# Altium PCB PCB.PcbDoc
Units mm, origin at the board's own origin, x right, y up, seen from the top; angles counter-clockwise.
Board outline 60 x 125.5 mm, 2 copper layers (Top Layer, Bottom Layer); 26 components, 15 nets, 73 pads, 131 vias.
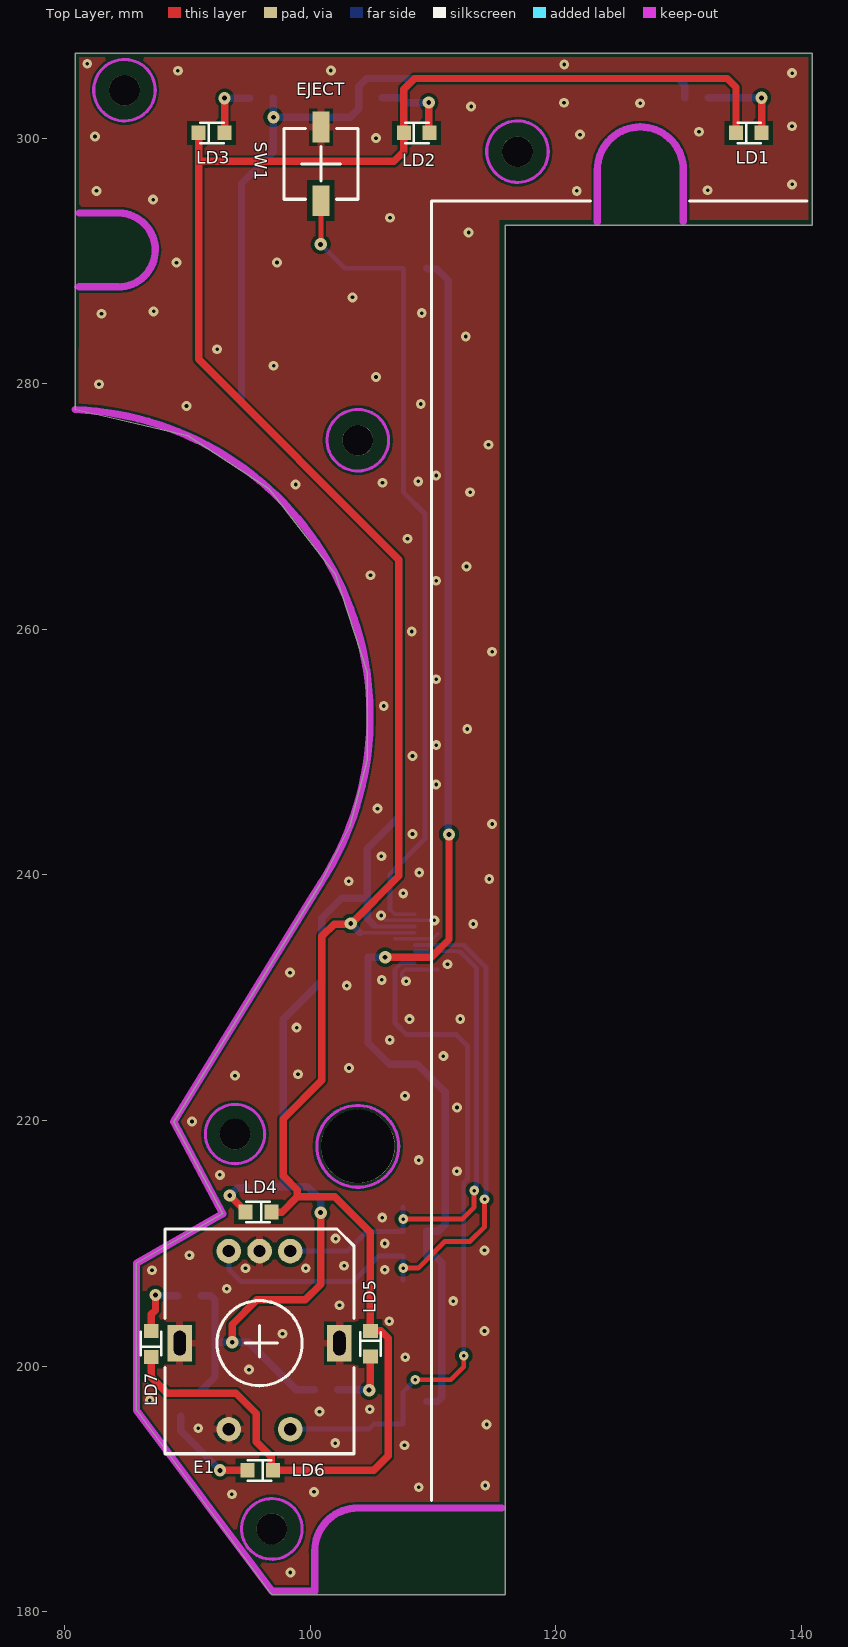
[diagram p0: Top Layer view]
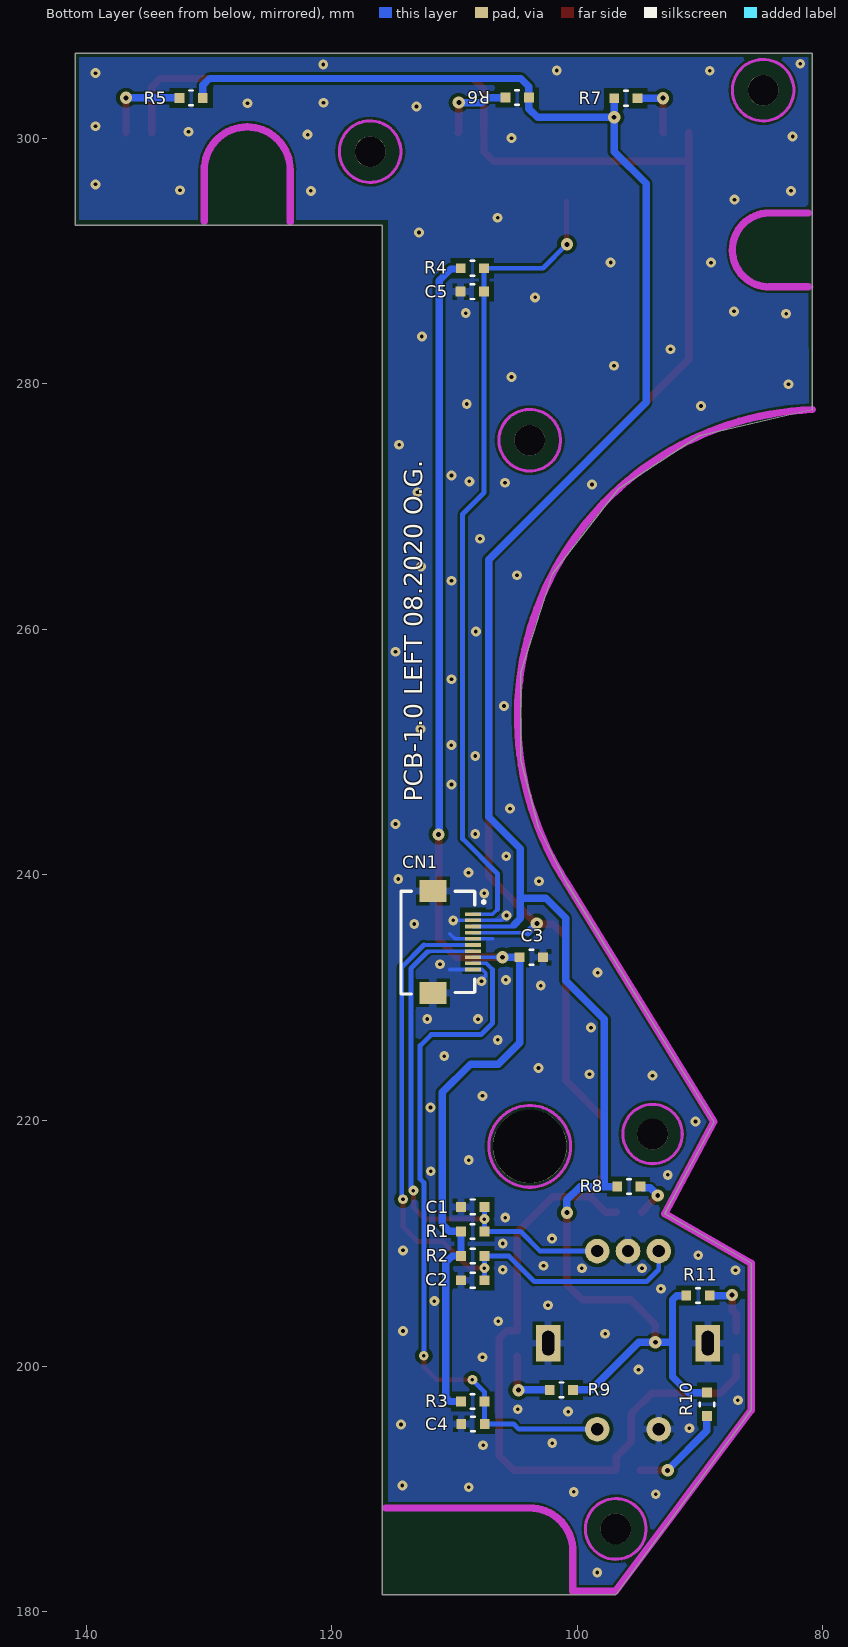
[diagram p1: Bottom Layer view, seen from below]
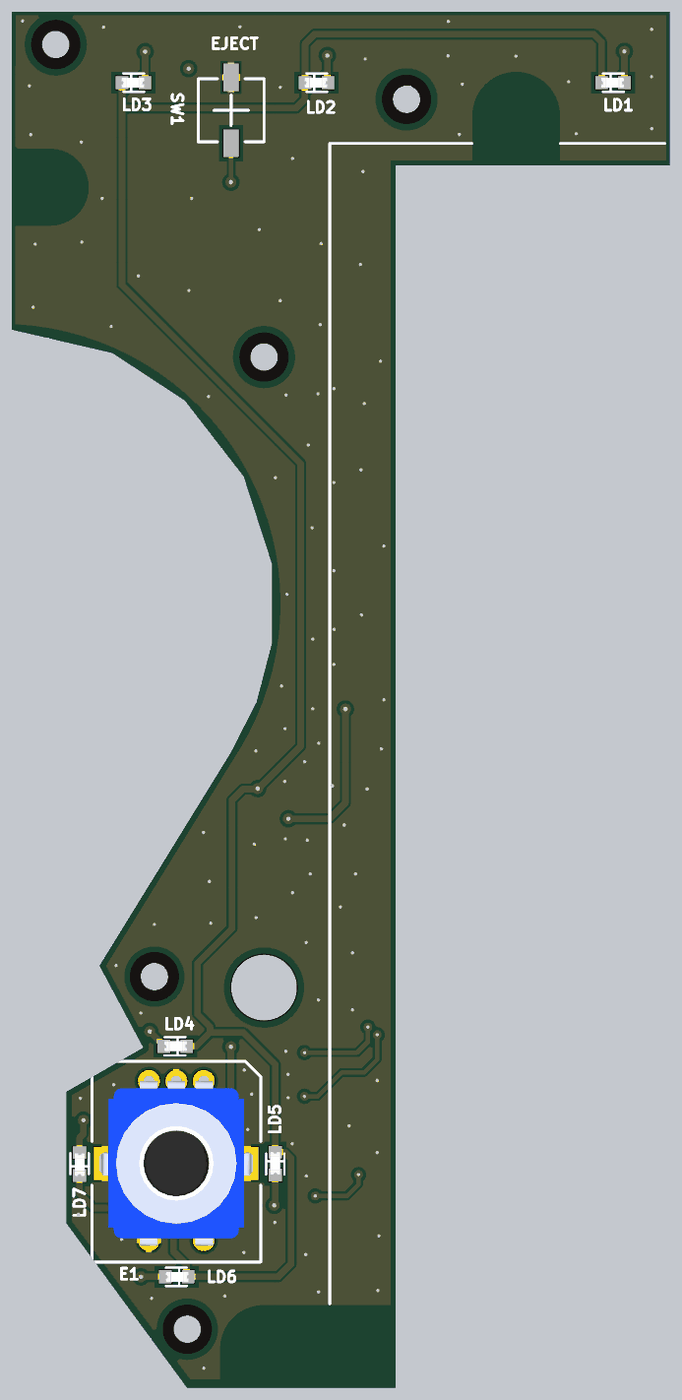
[diagram p2: 3D render of the assembled board from above, using the file's embedded part models]
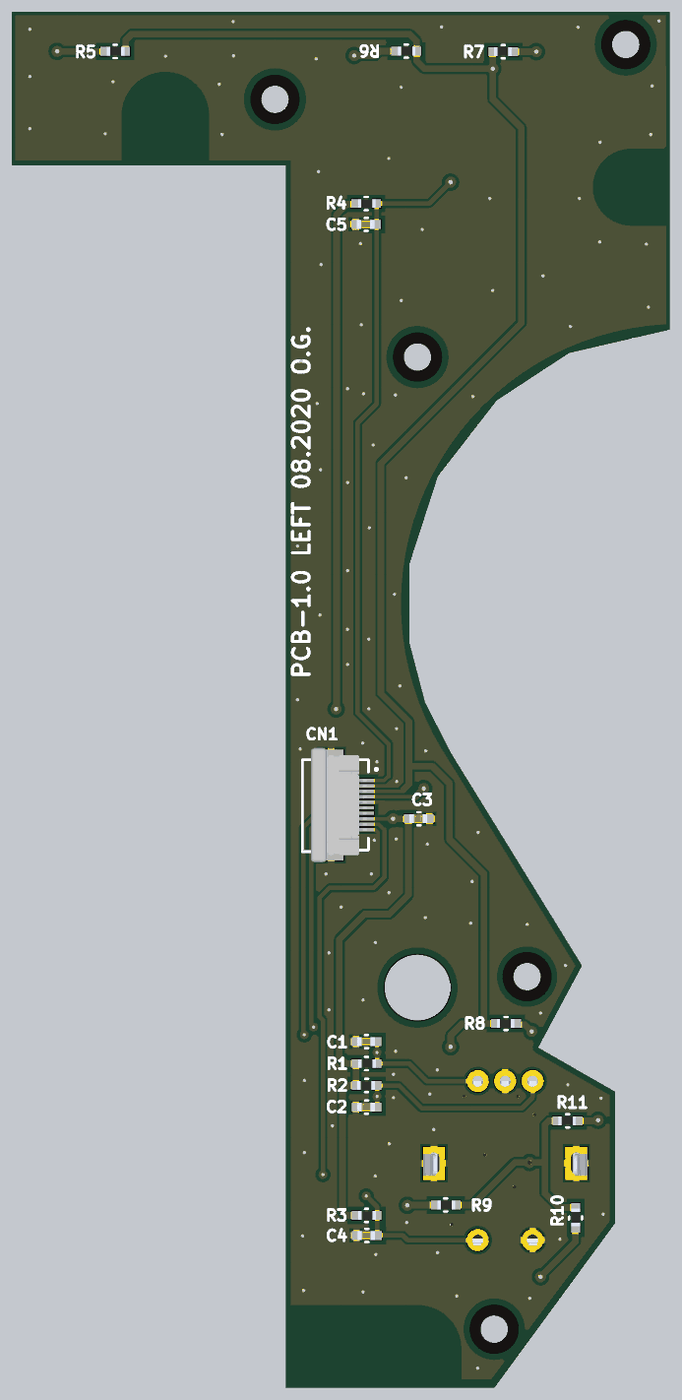
[diagram p3: 3D render of the assembled board from below, using the file's embedded part models]

## Layer stack, top to bottom
Top Solder: solder mask 0.0102, Solder Resist, Dk 3.5
Top Layer: signal copper 0.0356
Dielectric 1: dielectric 0.32, FR-4, Dk 4.8
Bottom Layer: signal copper 0.0356
Bottom Solder: solder mask 0.0102, Solder Resist, Dk 3.5

## Board outline
80.875,306.9 80.875,277.9 90.05,275.775 96.65,271.45 102.025,264.525 104.625,256.5 104.625,249.375 103.2,243.925 100.85,239.325 88.875,219.9 92.875,212.425 85.85,208.4 85.85,196.425 96.85,181.425 96.875,181.4 115.875,181.4 115.875,292.9 140.875,292.9 140.875,306.9

## Design rules (kind name [scope] priority, off if disabled: settings)
Clearance [All] p1: gap=0.2 ignorepadtopadclearanceinfootprint=FALSE except(0.3: THPad-Fill THPad-Poly THPad-Region Via-Fill Via-Poly Via-Region; 0.4: SMDPad-Fill SMDPad-Poly SMDPad-Region Fill-Fill Fill-Poly Fill-Region Poly-Poly Poly-Region Region-Region)
DiffPairsRouting [All] p1: maxlimit=0.254 minlimit=0.2 mostfreqgap=0.2 toplayer_minwidth=0.2 toplayer_maxwidth=0.381 toplayer_prefwidth=0.2 bottomlayer_minwidth=0.2 bottomlayer_maxwidth=0.381 bottomlayer_prefwidth=0.2 maxuncoupledlength=12.7
PolygonConnect [All] p1: thpad.connectstyle=Relief thpad.reliefconductorwidth=0.6 thpad.reliefentries=4 thpad.polygonreliefangle="90 Angle" thpad.airgapwidth=0.254 smdpad.connectstyle=Relief smdpad.reliefconductorwidth=0.6 smdpad.reliefentries=4 smdpad.polygonreliefangle="90 Angle" smdpad.airgapwidth=0.254 via.connectstyle=Direct via.reliefconductorwidth=0.6 via.reliefentries=4 via.polygonreliefangle="90 Angle" via.airgapwidth=0.254
RoomDefinition left_panel [InComponentClass('left_panel')] p1 off: confinementstyle=ConfineIn formatcopy=TRUE lockcomponents=FALSE outline 167.94,228.669 195.84,228.669 195.84,250.07 167.94,250.07
RoutingVias [All] p1: holewidth=0.4 width=1 viastyle="Through Hole" minholewidth=0.4 minwidth=1 maxholewidth=0.4 maxwidth=1
SolderMaskExpansion [All] p1: expansion=0.102
Width [All] p1: maxlimit=2 minlimit=0.3 preferedwidth=0.3 minimp=50.000000 maximp=50.000000 favimp=50.000000
29 further rules are at their usual default settings.

## Components (designator, comment, footprint, x,y, rotation, side; value= is the part's Value field where it differs from the comment)
C1 "CL10B103KB8NNNC" C0603 107.57,212.975 r0 bottom value=0.01uF
C2 "CL10B103KB8NNNC" C0603 107.57,207 r0 bottom value=0.01uF
C3 "CC0603KRX7R9BB104" C0603 102.795,233.3 r0 bottom value=0.1uF
C4 "CL10B103KB8NNNC" C0603 107.545,195.3 r0 bottom value=0.01uF
C5 "CL10B103KB8NNNC" C0603 107.6,287.5 r0 bottom value=0.01uF
CN1 "HDR10" 10S-0.5SH 111.5,234.45 r270 bottom locked
E1 "VOLUME/POWER" "Rotary Encoder" 95.875,201.875 r180 top locked
LD1 "LED_R" LED0805 134.793,300.425 r0 top locked
LD2 "LED_R" LED0805 107.743,300.425 r0 top locked
LD3 "LED_R" LED0805 91.043,300.425 r0 top locked
LD4 "LED_R" LED0805 96.7,212.55 r180 top
LD5 "LED_R" LED0805 104.9,202.757 r270 top locked
LD6 "LED_R" LED0805 96.832,191.525 r180 top locked
LD7 "LED_R" LED0805 87.05,200.893 r90 top locked
R1 "10k" R0603 109.475,210.975 r180 bottom
R2 "10k" R0603 107.57,208.975 r0 bottom
R3 "10k" R0603 109.475,197.125 r180 bottom
R4 "10k" R0603 109.5,289.4 r180 bottom
R5 "620" R0603 132.4,303.275 r180 bottom
R6 "620" R0603 105.855,303.3 r180 bottom
R7 "620" R0603 95.095,303.25 r0 bottom
R8 "620" R0603 94.845,214.625 r0 bottom
R9 "620" R0603 102.25,198.075 r180 bottom
R10 "620" R0603 89.45,195.945 r90 bottom
R11 "620" R0603 89.225,205.75 r0 bottom
SW1 "EJECT" 6X6-SMT-2PIN 100.875,297.9 r270 top value="SW tact 2-pin"

## Footprints (in the part's own frame and the unit in brackets; to place one, negate y for a bottom-side part, rotate by r counter-clockwise, add the part's x,y. Pads: shape width x height; smd on the part's side, far side on the other; paste and mask are expansions set on the pad)
6X6-SMT-2PIN [mm]
  rect 2.5x1.4 smd: 1(-3,0) 2(3,0)
  silkscreen extent -2.88,-3 2.88,3, body extent -2.88,-3 2.88,2.98, height 5
10S-0.5SH [mm]
  rect 0.3x1.3 smd: 1(-2.35,3) 2(-1.85,3) 3(-1.35,3) 4(-0.85,3) 5(-0.35,3) 6(0.15,3) 7(0.65,3) 8(1.15,3) 9(1.65,3) 10(2.15,3)
  rect 1.8x2.2 smd: ""(-4.25,-0.25) ""(4.05,-0.25)
  silkscreen extent -4.23,-2.88 4.15,3.98, body extent -5.31,-2.11 5.12,3, height 2.1
C0603 [mm]
  rect 0.8x0.8 smd: 1(1.905,0) 2(0,0)
  silkscreen extent 0.8,-0.6 1.1,0.6, body extent 0.2,-0.4 1.8,0.4, height 0.9
LED0805 [mm]
  rect 1.14x1.2 smd: 1(-0.127,0) 2(1.957,0)
  silkscreen extent 0,-0.83 1.91,0.84, body extent -0.16,-0.46 1.9,0.45, height 0.85
R0603 [mm]
  rect 0.8x0.8 smd: 1(1.905,0) 2(0,0)
  silkscreen extent 0.8,-0.6 1.1,0.6, body extent 0.2,-0.4 1.8,0.4, height 0.5
"Rotary Encoder" [mm] "Rotary Encoder - SW"
  round 2 hole 1: 1(-2.5,-7.5) 2(0,-7.5) 3(2.5,-7.5) 4(2.5,7) 5(-2.5,7)
  rect 2x3 hole 1 slot 2 at 90 deg: MP1(-6.5,0) MP2(6.5,0)
  silkscreen extent -7.7,-9.3 7.7,9, body extent -7.5,-7.5 7.5,7.5, height 16.2

## Part data
C1 C2 C3 C4 C5: library part CAP_NPOL, "CAP_NPOL"
CN1: library part "HDR 10", "Header, 10-Pin", LatestRevisionDate=17-Jul-2002, LatestRevisionNote="Re-released for DXP Platform.", Publisher="Altium Limited"
E1: library part ENC_SW, "ENC_SW"
LD1 LD2 LD3 LD4 LD5 LD6 LD7: library part LED_RED, "LED Red"
R1 R2 R3 R4 R5 R6 R7 R8 R9 R10 R11: library part RESISTOR, "RES"
SW1: library part "SW tact 2-pin", "Microswitches, DTSMB-3 series"

## Free pads (board coordinates)
  round 2.5 hole 2.5 unplated mask+1: MH(84.875,303.9) MH(93.875,218.9) MH(96.875,186.75) MH(103.875,275.4) MH(116.875,298.9)
  round 6 hole 6 unplated: MH(103.875,217.9)

## Via types
v1: diameter 0.8, hole 0.3, Top Layer to Bottom Layer, tented both sides, 117 vias
v2: diameter 1, hole 0.4, Top Layer to Bottom Layer, tented both sides, 14 vias

## Nets (pads, with @x,y where several pads share a name; then routed paths per layer and width w, separated by ;. In a path a pad name is that pad's centre, name@x,y a point inside that pad or via, vN(x,y) a via of type N, cw(c..) or ccw(c..) an arc to the next point about the centre after c; other vN are vias at no path point)
ENC_VOL_A: C1.2 CN1.7 E1.1 R1.1 | length 43.2
  Top Layer w0.4: v1(107.57,211.975) 112.375,211.975 113.35,212.95 v1(113.35,214.3)
  Bottom Layer w0.3: CN1.7 112.05,233.8 112.1,233.75
  Bottom Layer w0.4: E1.1 103.025,209.375 104.625,210.975 R1.1 v1(107.57,211.975) C1.2 ; 112.1,233.75 112.2,233.75 113.55,232.4 113.55,214.5 v1(113.35,214.3)
ENC_VOL_B: C2.2 CN1.6 E1.3 R2.2 | length 54.7
  Top Layer w0.4: v1(107.57,207.988) 108.788,207.988 110.95,210.15 113,210.15 114.2,211.35 v1(114.2,213.6)
  Bottom Layer w0.3: CN1.6 112.5,234.3 ; v1(114.2,213.6) v1@114.3,213.7
  Bottom Layer w0.4: E1.3 93.375,207.875 94.35,206.9 103.5,206.9 105.575,208.975 R2.2 v1(107.57,207.988) C2.2 ; 112.5,234.3 114.3,232.5 v1@114.3,213.7
GND: C1.1 C2.1 C3.2 C4.1 C5.1 CN1. CN1.2 CN1.5 CN1.10 E1.2 E1.4 E1.MP1 E1.MP2 SW1.1 | length 12
  Bottom Layer w0.3: v1(105.77,236.7) 105.796,236.7 106.196,236.3 CN1.2 v1(110.11,236.3) ; 106.88,234.8 CN1.5 109.97,234.8 110.38,235.21 ; v1(107.81,231.34) 107.81,231.426 107.47,231.766 107.47,232.029 107.741,232.3 CN1.10 110.38,232.3
  other v1: 98.38,183.2 93.62,189.57 100.3,189.77 108.84,190.14 114.25,190.28 107.67,193.56 102.04,193.74 90.88,194.95 114.36,195.25 100.75,196.3 104.85,196.49 86.93,197.23 95.02,199.72 107.73,200.73 97.74,202.65 114.19,202.86 106.44,203.66 102.39,204.96 111.64,205.3 93.2,206.31 87.12,207.81 106.07,207.86 94.73,207.98 99.63,207.98 102.76,208.18 90.16,209.04 114.19,209.43 106.07,209.99 102.07,210.39 105.87,212.1 92.64,215.58 111.94,215.88 108.84,216.78 90.38,219.92 111.95,221.07 107.72,222.01 93.88,223.66 99.01,223.78 103.16,224.28 110.84,225.25 106.48,226.57 98.89,227.57 108.09,228.26 112.22,228.27 102.98,230.99 105.82,231.46 98.35,232.05 111.18,232.73 113.28,236.01 107.58,238.5 103.13,239.49 114.58,239.67 108.87,240.19 105.79,241.52 108.32,243.33 114.81,244.15 105.48,245.4 110.25,247.37 108.32,249.68 110.26,250.57 112.78,251.89 105.98,253.76 110.25,255.93 114.81,258.17 108.26,259.83 110.25,263.96 104.91,264.4 112.72,265.12 107.92,267.38 113.02,271.16 98.81,271.8 105.89,271.94 108.79,272.05 110.25,272.52 114.51,275.03 89.93,278.19 109,278.35 82.8,279.95 105.36,280.54 97.02,281.47 92.42,282.8 112.66,283.85 83,285.7 109.08,285.75 87.25,285.89 103.44,287.03 89.11,289.86 97.29,289.87 112.9,292.32 106.49,293.51 87.21,294.99 82.6,295.7 121.7,295.7 132.36,295.76 139.24,296.23 105.36,300 82.47,300.13 121.96,300.28 131.66,300.51 139.23,300.97 113.1,302.58 126.86,302.84 120.67,302.88 139.24,305.29 89.22,305.49 101.68,305.51 120.69,306 81.85,306.05
KEY_EJECT: C5.2 CN1.1 R4.1 SW1.2 | length 67.3
  Top Layer w0.3: v2(100.85,291.35) v2@100.875,291.375
  Top Layer w0.4: v2@100.875,291.425 SW1.2
  Bottom Layer w0.3: 106.5,237.2 106.9,236.8 CN1.1 ; C5.2@107.595,287.505 C5.2
  Bottom Layer w0.4: v2(100.85,291.35) 102.8,289.4 R4.1 C5.2@107.595,287.505 ; 106.5,237.2 106.5,240.1 109.34,242.94 109.34,269.39 107.6,271.13 C5.2
KEY_POWER: C4.2 CN1.9 E1.5 R3.1 | length 56.8
  Top Layer w0.4: v1(108.55,198.9) 111.45,198.9 112.5,199.95 v1(112.5,200.85)
  Bottom Layer w0.3: 106.9,232.3 107.4,232.8 CN1.9
  Bottom Layer w0.4: E1.5 104.775,194.875 105.2,195.3 C4.2 107.545,197.895 v1(108.55,198.9) ; 106.9,232.3 106.9,227.95 107.85,227 111.9,227 112.8,226.1 112.8,215.25 112.5,214.95 v1(112.5,200.85)
LED_A: CN1.3 R5.1 R6.1 R7.1 R8.1 R9.1 R10.1 R11.1 | length 184.9
  Top Layer w0.6: v2(93.65,201.95) 93.65,203.4 95.65,205.4 99.6,205.4 100.85,206.65 v2(100.85,212.5)
  Bottom Layer w0.3: 105.2,235.8 CN1.3
  Bottom Layer w0.6: R10.1 90.95,197.85 92.25,199.15 92.25,201.95 ; R11.1 91.899,205.75 92.25,205.399 92.25,201.95 ; R8.1 97.8,214.625 ; R7.1 v2(97,301.7) ; R9.1 98.875,198.075 95,201.95 v2(93.65,201.95) 92.25,201.95 ; v2(100.85,212.5) 100.85,213.55 99.775,214.625 97.8,214.625 ; 105.15,235.95 104.65,236.45 104.65,238.1 ; R5.1 130.495,304.305 129.95,304.85 104.6,304.85 103.95,304.2 R6.1 103.95,302.4 103.25,301.7 v2(97,301.7) ; v2(97,301.7) 97,298.9 94.4,296.3 94.4,278.5 107.22,265.68 107.22,244.72 104.65,242.15 104.65,238.1 ; 97.8,214.625 97.8,228.25 100.95,231.4 100.95,236.5 102.55,238.1 104.65,238.1
LED_K: CN1.4 LD1.1 LD2.1 LD3.1 LD4.1 LD5.1 LD6.1 LD7.1 | length 213.1
  Top Layer w0.6: LD7.1 87.05,199.1 88.35,197.8 93.95,197.8 95.6,196.15 95.6,193.85 96.821,192.629 96.821,191.663 LD6.1 105.175,191.525 106.35,192.7 106.35,202.3 105.766,202.884 LD5.1 104.9,210.9 102,213.8 98.95,213.8 ; LD3.1 90.916,298.1 ; LD4.1 97.7,212.55 98.95,213.8 ; LD2.1@107.6,300.4 107.6,298.9 106.8,298.1 91.7,298.1 90.916,298.1 ; LD2.1 107.616,303.966 108.5,304.85 133.95,304.85 134.666,304.134 LD1.1 ; 90.916,298.1 90.916,281.984 107.22,265.68 107.22,239.92 103.3,236 101.95,236 100.95,235 100.95,223.28 97.8,220.13 97.8,215.5 98.95,214.35 98.95,213.8
  Bottom Layer w0.3: 104.05,235.3 CN1.4
  Bottom Layer w0.6: v2(103.3,236.05) 104.05,235.3
NetLD1_2: LD1.2 R5.2 | length 7.2
  Top Layer w0.6: LD1.2 v2(136.75,303.275)
  Bottom Layer w0.6: R5.2 v2(136.75,303.275)
NetLD2_2: LD2.2 R6.2 | length 6.5
  Top Layer w0.6: v2(109.65,302.89) 109.65,300.475 LD2.2
  Bottom Layer w0.6: R6.2 107.33,303.3 107.74,302.89 v2(109.65,302.89)
NetLD3_2: LD3.2 R7.2 | length 4.9
  Top Layer w0.6: LD3.2 93.025,300.45 v2(93.025,303.25)
  Bottom Layer w0.6: v2(93.025,303.25) R7.2
NetLD4_2: LD4.2 R8.2 | length 3.6
  Top Layer w0.6: v2(93.45,213.9) 94.473,212.877 94.473,212.82 LD4.2
  Bottom Layer w0.6: v2(93.45,213.9) 94.075,214.525 94.745,214.525 R8.2
NetLD5_2: LD5.2 R9.2 | length 5.5
  Top Layer w0.6: v2(104.8,198.05) 104.9,198.15 LD5.2
  Bottom Layer w0.3: v2(104.8,198.05) 104.85,198.05 v2@104.875,198.075
  Bottom Layer w0.6: R9.2 v2@104.875,198.075
NetLD6_2: LD6.2 R10.2 | length 8
  Top Layer w0.6: v2(92.65,191.525) LD6.2
  Bottom Layer w0.6: R10.2 89.45,194.75 92.65,191.55 v2(92.65,191.525)
NetLD7_2: LD7.2 R11.2 | length 4.9
  Top Layer w0.6: LD7.2 87.05,204.22 87.4,204.57 v2(87.4,205.8)
  Bottom Layer w0.6: v2@87.4,205.75 R11.2
VDD: C3.1 CN1.8 R1.2 R2.1 R3.2 R4.2 | length 108.7
  Top Layer w0.6: v2(106.1,233.3) 109.85,233.3 111.3,234.75 v2(111.3,243.3)
  Bottom Layer w0.3: v2@106.4,233.3 CN1.8
  Bottom Layer w0.6: v2@106.4,233.3 v2(106.1,233.3) C3.1 104.7,226.35 106.45,224.6 108.7,224.6 111,222.3 111,211.55 110.425,210.975 R1.2 R2.1 110.185,208.975 110.72,208.44 110.72,197.46 110.385,197.125 R3.2 ; R4.2 109.561,289.339 110.311,289.339 111.25,288.4 v2@111.25,243.25

## Polygon pours and split planes (outlines as drawn)
GND on Top Layer "Top Layer-GND" (solid, remove dead copper, pour order 0): 81.21,306.59 140.57,306.59 140.57,293.34 115.41,293.34 115.41,181.95 81.01,181.95
GND on Bottom Layer "Bottom Layer-GND" (solid, remove dead copper, pour order 2): 81.21,306.59 140.57,306.59 140.57,293.34 115.41,293.34 115.41,181.95 81.01,181.95

## Keep-outs
Keep-Out Layer:
  circle w0.254: c116.875,298.9 r2.507
  circle w0.254: c84.875,303.9 r2.506
  circle w0.254: c103.875,275.4 r2.508
  circle w0.254: c103.875,217.9 r3.33
  circle w0.254: c96.875,186.75 r2.469
  circle w0.254: c93.875,218.9 r2.417
  lines w0.254: 80.88,287.89 81.166,287.89
  lines w0.6: 80.88,277.9 cw(c79.863,252.911) 100.87,239.34 100.21,238.28 88.88,219.91 92.87,212.42 85.85,208.4 85.85,196.41 96.89,181.68 100.37,181.68 100.37,184.96 cw(c103.852,184.968) 103.88,188.45 115.61,188.45 ; 81.175,287.881 84.37,287.881 ccw(c84.371,290.89) 84.43,293.898 81.18,293.898 ; 123.38,293.2 123.38,297.4 cw(c126.88,297.41) 130.38,297.4 130.38,293.21

## Silkscreen, mask and mechanical layers (free items; w line width, h text height)
Top Overlay:
  lines w0.254: 94.7,201.875 95.875,201.875 ; 95.875,200.75 95.875,201.875 ; 95.875,203.3 95.875,201.875 ; 97.325,201.875 95.875,201.875 ; 99.3,297.9 102.45,297.9 ; 100.875,296.525 100.875,299.325 ; 109.875,189.07 109.875,294.875 118.5,294.875 122.825,294.875 ; 130.9,294.875 140.425,294.875
  text "EJECT" at 98.85,303.5 h1
Bottom Overlay:
  text "PCB-1.0 LEFT 08.2020 O.G." at 112.63,245.97 h1.5 r270
Mechanical 1:
  lines w0.254: 80.9,293.925 80.925,293.9
  lines w0.3: 80.875,277.896 cw(c79.875,252.916) 100.87,239.343 88.875,219.9 92.875,212.425 85.85,208.4 85.85,196.4 96.875,181.4 100.325,181.4 ; 80.875,277.9 80.875,287.9 84.375,287.9 ccw(c84.375,290.9) 84.375,293.9 ; 80.9,293.925 80.9,306.9 140.875,306.9 140.875,292.9 130.375,292.9 130.375,297.4 ; 80.925,293.9 84.375,293.9 ; 100.372,184.975 cw(c103.875,184.95) 103.875,188.453 ; 100.375,181.45 100.375,184.975 ; 103.85,188.45 115.875,188.45 115.875,292.9 123.35,292.9 ; 123.375,292.925 123.375,297.4 ; 123.376,297.4 cw(c126.875,297.4) 130.374,297.4
Mechanical 15:
  circle w0.254: c95.875,201.875 r12.007